# Altium PCB Sampler_DIOT.PCBDOC (part 4 of 10)
Units mm, origin at the board's own origin, x right, y up, seen from the top; angles counter-clockwise.
Board outline 222.9 x 100 mm, 4 copper layers (L1, P2, L3, L4), stack 1.6 mm thick; 697 components, 418 nets, 2175 pads, 1124 vias.
Unrouted connection lines stored in the file: 6.
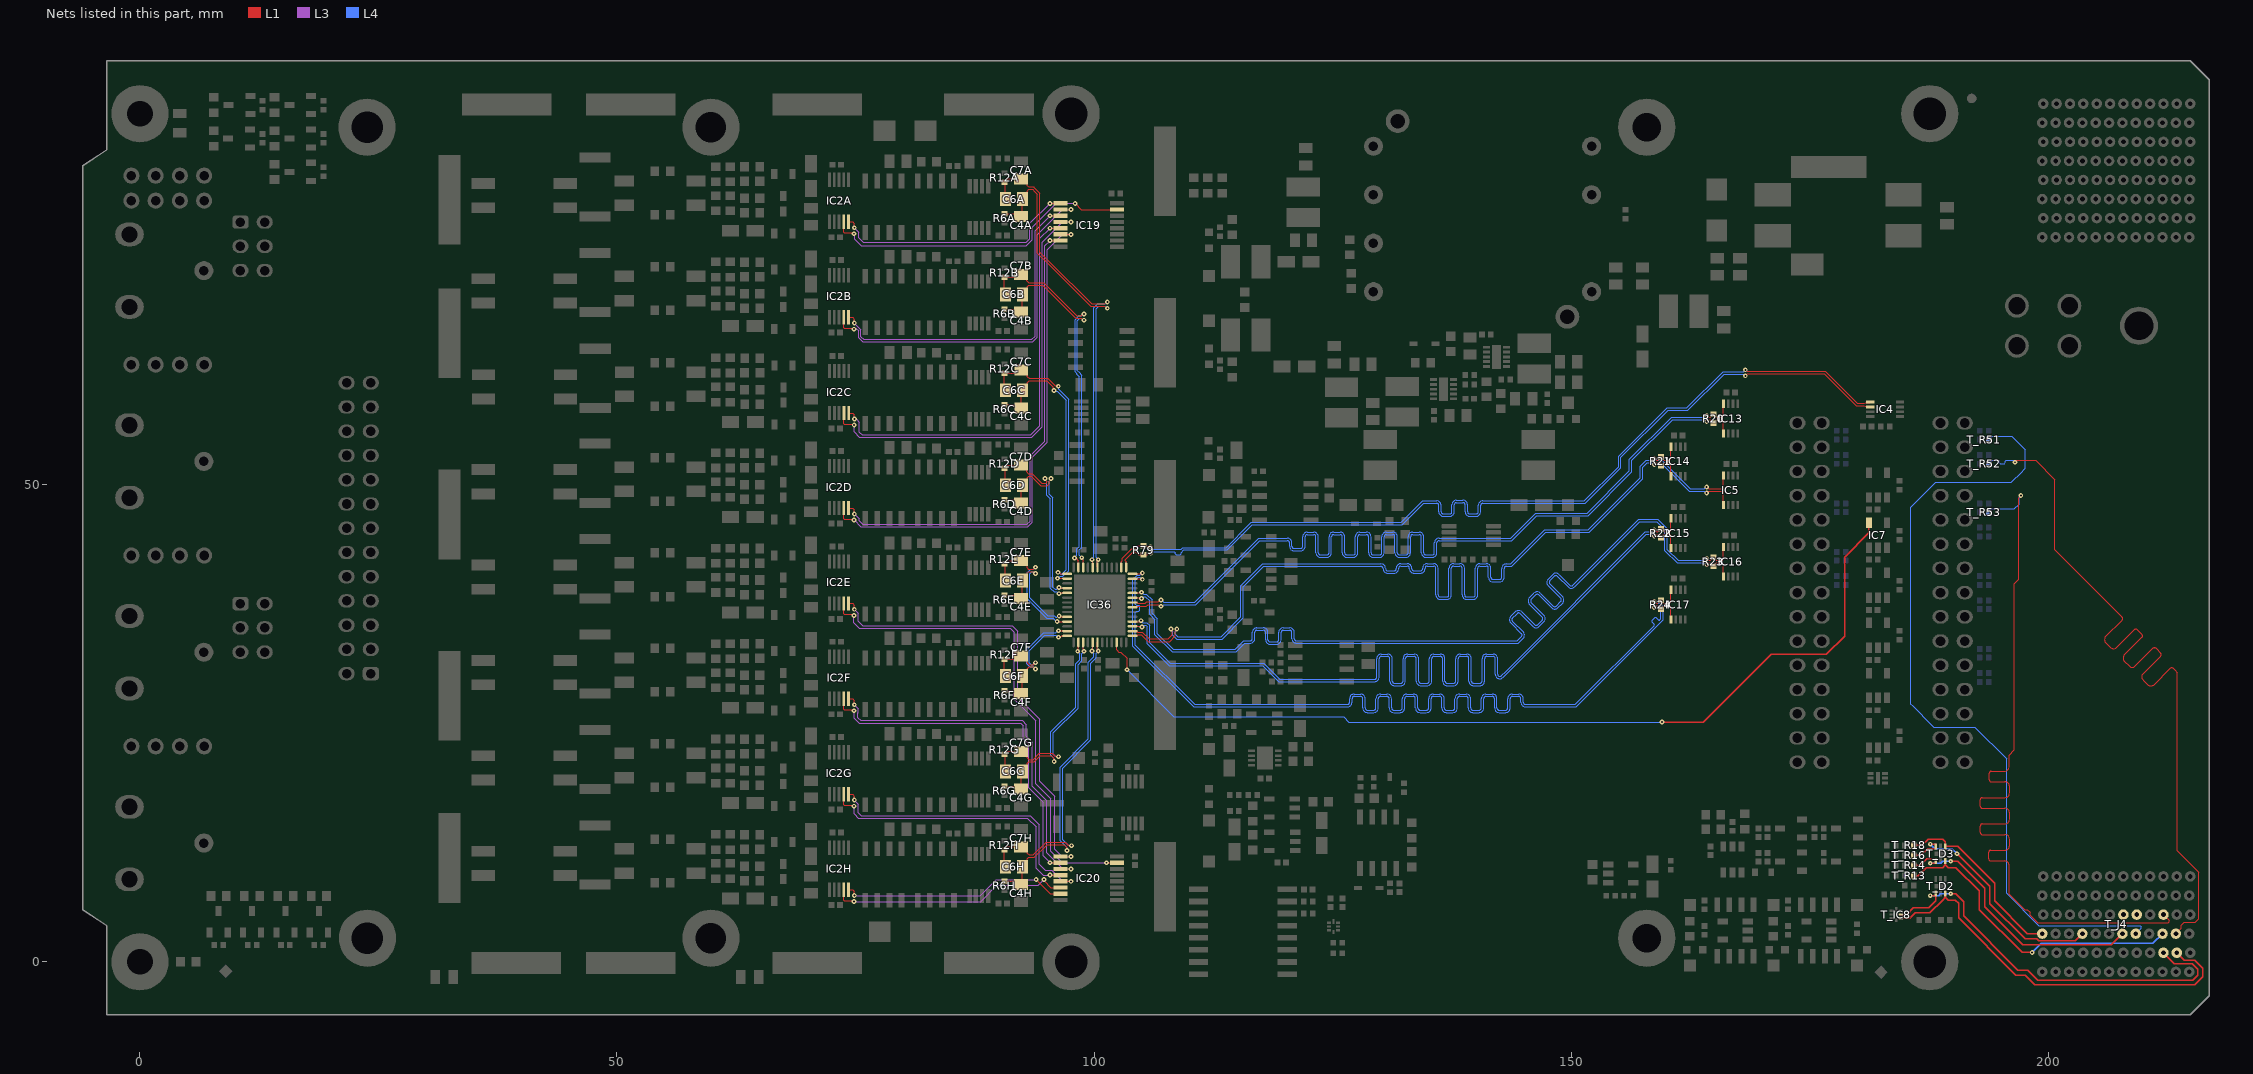
[diagram p5: the nets of this part, all layers, seen from the top]

## Part data (continued)
R58 R70: library part R0603_36k_1%_0.1W_100PPM, "Resistor - 1%", Case=0603, Manufacturer=GENERIC, Manufacturer1 ComponentHeight=0.55mm, Manufacturer1 Example="NIC COMPONENT", Manufacturer1 Part Number=NRC06F3602TRF, Manufacturer Part Number=R0603_36K_1%_0.1W_100PPM, Power=0.1W, Tolerance=±1%, Author="CERN DEM JLC", Component Type=Standard, CreateDate=03.12.2007, HelpURL=\\cern.ch\dfs\Applications\Altium\Datasheets\R0603_NIC_NRC.pdf, LatestRevisionDate=13.03.2008, Mounted=Yes, Part Description="General Purpose Thick Film Chip Resistor", Part Number=R0603_36K_1%_0.1W_100PPM, Pin Count=2, PressFit=No, Sense=No, SMD=Yes, Socket=No, Status=Preferred, TC=±100ppm/°C
R62 R73: library part R0402_62K_1%_0.0625W_100PPM, "Resistor - 1%", Case=0402, Manufacturer=GENERIC, Manufacturer1 ComponentHeight=0.4mm, Manufacturer1 Example="YAGEO PHYCOMP", Manufacturer1 Part Number=232270676203L, Power=0.0625W, Tolerance=±1%, Author="CERN DEM JLC", Component Type=Standard, CreateDate=03.12.2007, HelpURL=\\cern.ch\dfs\Applications\Altium\Datasheets\R0402_Phycomp_RC0402.pdf, LatestRevisionDate=17.10.2012, Manufacturer Part Number=R0402_62K_1%_0.0625W_100PPM, Mounted=Yes, Part Description="General Purpose Thick Film Chip Resistor", Part Number=R0402_62K_1%_0.0625W_100PPM, Pin Count=2, PressFit=No, Sense=No, SMD=Yes, Socket=No, Status="Not Recommended", TC=±100ppm/°C
R66: library part R0603_270K_1%_0.1W_100PPM, "Resistor - 1%", Case=0603, Manufacturer=GENERIC, Manufacturer1 ComponentHeight=0.55mm, Manufacturer1 Example="NIC COMPONENT", Manufacturer1 Part Number=NRC06F2703TRF, Power=0.1W, Tolerance=±1%, Author="CERN DEM JLC", Component Type=Standard, CreateDate=03.12.2007, HelpURL=\\cern.ch\dfs\Applications\Altium\Datasheets\R0603_NIC_NRC.pdf, LatestRevisionDate=13.03.2008, Manufacturer Part Number=R0603_270K_1%_0.1W_100PPM, Mounted=Yes, Part Description="General Purpose Thick Film Chip Resistor", Part Number=R0603_270K_1%_0.1W_100PPM, Pin Count=2, Sense=No, SMD=Yes, Socket=No, Status=Preferred, TC=±100ppm/°C
R68 R77: library part R0603_82K_1%_0.1W_100PPM, "Resistor - 1%", Case=0603, Manufacturer=GENERIC, Manufacturer1 ComponentHeight=0.55mm, Manufacturer1 Example="NIC COMPONENT", Manufacturer1 Part Number=NRC06F8202TRF, Power=0.1W, Tolerance=±1%, Author="CERN DEM JLC", Component Type=Standard, CreateDate=03.12.2007, HelpURL=\\cern.ch\dfs\Applications\Altium\Datasheets\R0603_NIC_NRC.pdf, LatestRevisionDate=13.03.2008, Manufacturer Part Number=R0603_82K_1%_0.1W_100PPM, Mounted=Yes, Part Description="General Purpose Thick Film Chip Resistor", Part Number=R0603_82K_1%_0.1W_100PPM, Pin Count=2, Sense=No, SMD=Yes, Socket=No, Status=Preferred, TC=±100ppm/°C
R71 R72: library part R0402_33K_1%_0.0625W_100PPM, "Resistor - 1%", Case=0402, Manufacturer=GENERIC, Manufacturer1 ComponentHeight=0.4mm, Manufacturer1 Example="YAGEO PHYCOMP", Manufacturer1 Part Number=232270673303L, Power=0.0625W, Tolerance=±1%, Author="CERN DEM JLC", Component Type=Standard, CreateDate=03.12.2007, HelpURL=\\cern.ch\dfs\Applications\Altium\Datasheets\R0402_Phycomp_RC0402.pdf, LatestRevisionDate=17.10.2012, Manufacturer Part Number=R0402_33K_1%_0.0625W_100PPM, Mounted=Yes, Part Description="General Purpose Thick Film Chip Resistor", Part Number=R0402_33K_1%_0.0625W_100PPM, Pin Count=2, PressFit=No, Sense=No, SMD=Yes, Socket=No, Status="Not Recommended", TC=±100ppm/°C
R76: library part R0603_1K_1%_0.1W_100PPM, "Resistor - 1%", Case=0603, Manufacturer=GENERIC, Manufacturer1 ComponentHeight=0.55mm, Manufacturer1 Example="NIC COMPONENT", Manufacturer1 Part Number=NRC06F1001TRF, Power=0.1W, Tolerance=±1%, Author="CERN DEM JLC", Component Type=Standard, CreateDate=03.12.2007, HelpURL=\\cern.ch\dfs\Applications\Altium\Datasheets\R0603_NIC_NRC.pdf, LatestRevisionDate=13.03.2008, Manufacturer Part Number=R0603_1K_1%_0.1W_100PPM, Mounted=Yes, Part Description="General Purpose Thick Film Chip Resistor", Part Number=R0603_1K_1%_0.1W_100PPM, Pin Count=2, Sense=No, SMD=Yes, Socket=No, Status=Preferred, TC=±100ppm/°C
R91: library part R0402_470R_1%_0.0625W_100PPM, "Resistor - 1%", Case=0402, Manufacturer=GENERIC, Manufacturer1 ComponentHeight=0.4mm, Manufacturer1 Example="YAGEO PHYCOMP", Manufacturer1 Part Number=232270674701L, Power=0.0625W, Tolerance=±1%, Author="CERN DEM JLC", Component Type=Standard, CreateDate=03.12.2007, HelpURL=\\cern.ch\dfs\Applications\Altium\Datasheets\R0402_Phycomp_RC0402.pdf, LatestRevisionDate=17.10.2012, Manufacturer Part Number=R0402_470R_1%_0.0625W_100PPM, Mounted=Yes, Part Description="General Purpose Thick Film Chip Resistor", Part Number=R0402_470R_1%_0.0625W_100PPM, Pin Count=2, PressFit=No, Sense=No, SMD=Yes, Socket=No, Status="Not Recommended", TC=±100ppm/°C
RN1A RN1B RN1C RN1D RN1E RN1F RN1G RN1H RN2A RN2B RN2C RN2D RN2E RN2F RN2G RN2H RN3 RN4: library part RN_10K_5K_VISHAY_AORN2-1AT3, "DIL8 Resistor Network 4 Resistors 10k-5k-5k-10k 0.1%", Case=SOIC8, Manufacturer="VISHAY DALE", Manufacturer Part Number=AORN2-1AT3, Power=4x0.1W, Tolerance=0.1%, Author="CERN DEM JLC", ComponentHeight=1.73mm, Component Type=Standard, CreateDate=20.02.2017, HelpURL=\\cern.ch\dfs\Applications\Altium\Datasheets\RN_VISHAY_AORN.pdf, LatestRevisionDate=20.02.2017, Mounted=Yes, Part Description="Dual-In-Line Thin Film Precision Automotive Resistors Network, (4 Isolated) - AORN Series", Part Number=RN_10K_5K_VISHAY_AORN2-1AT3, Pin Count=8, PressFit=No, Sense=No, SMD=Yes, Socket=No, TC=±25ppm/°C
rT_J1 T_J2: library part 3M_N2530-6002RB, "Connector 30 Male", Manufacturer=3M, Manufacturer Part Number=N2530-6002RB, Author="CERN DEM JLC", ComponentHeight=10.03mm, Component Type=Standard, CreateDate=11.02.2009, Family="Header 30", HelpURL=\\cern.ch\dfs\Applications\Altium\Datasheets\3M_N2530-6002RB.pdf, LatestRevisionDate=11.08.2009, Mounted=Yes, Part Description="30 Contacts - Straight .100'' x .100'' Low Profile Four-Wall Header, 2500 Series", Part Number=3M_N2530-6002RB, Pin Count=30, PressFit=No, Sense=No, SMD=No, Socket=No, Status=None
SCREW1 SCREW2: library part BOSSARD_BN5687-3061606_v, "Screw", Manufacturer=BOSSARD, Manufacturer Part Number="BN5687 Art.3061606", Author="CERN DEM JLC", Component Type=Mechanical, ComponentHeight=2.4mm, CreateDate=07.02.2013, HelpURL=\\cern.ch\dfs\Applications\Altium\Datasheets\BOSSARD_BN5687-3061606.pdf, LatestRevisionDate=07.02.2013, Mounted=Yes, PackageDescription="M3 L=8mm Hexalobular Socket Pan Head Screw, Fully Threaded - Stainless Steel A2", Part Description="M3 L=8mm Hexalobular Socket Pan Head Screw, Fully Threaded, Stainless Steel A2", Part Number=BOSSARD_BN5687-3061606_v, Pin Count=0, PressFit=No, Sense=No, SMD=No, Socket=No, Status=None
Standoff1 Standoff2: library part SAMTEC_SO-1115-03-02-02-N, "Standoff Male-Female", Manufacturer=SAMTEC, Manufacturer Part Number=SO-1115-03-02-02-N, Author="CERN DEM BC", Component Type=Mechanical, ComponentHeight=11.15mm, CreateDate=21.07.2020, HelpURL=\\cern.ch\dfs\Applications\Altium\Datasheets\SAMTEC_SO-1115-03-02-02-N.pdf, LatestRevisionDate=21.07.2020, Mounted=Yes, PackageDescription="11.15mm Length, Precision Board Stacking Standoff M3 Male/Female", Part Description="11.15mm Length, Precision Board Stacking Standoff M3 Male/Female", Part Number=SAMTEC_SO-1115-03-02-02-N, Pin Count=1, PressFit=No, Sense=No, SMD=No, Socket=No, Status=None
SW1A SW1B SW1C SW1D SW1E SW1F SW1G SW1H: library part SW_CTS_204-121ST, "2x SPST DIP Switch 1NO + 1NF", Manufacturer=CTS, Manufacturer Part Number=204-121ST, Author="CERN DEM JLC", ComponentHeight=10.36mm, Component Type=Standard, CreateDate=28.08.2014, Family=Switch, HelpURL=\\cern.ch\dfs\Applications\Altium\Datasheets\SW_CTS_204-121ST.pdf, LatestRevisionDate=28.08.2014, Mounted=Yes, PackageDescription="Body 7.26 x 9.78mm, 2x SPST DIP, 1NO + 1NF Switch, CTS 204 Series", Part Description="Coupled SPST DIP Switch, 1NO + 1NF, CTS 204 Series", Part Number=SW_CTS_204-121ST, Pin Count=4, PressFit=No, Sense=No, SMD=Yes, Socket=No, Status=None
T1 T2 T3 T4 T5 T6 T7 T8 T9: "N-CHANNEL MOSFET WITH DIODE", Case=SOT23-3, Manufacturer="ON SEMICONDUCTOR", Author="CERN DEM JLC", Bonding=No, ComponentHeight=1.11mm, Component Type=Standard, CreateDate=23.03.2009, Device=BSS138LT1G, HelpURL=\\cern.ch\dfs\Applications\Altium\Datasheets\BSS138LT1G.pdf, LatestRevisionDate=23.03.2009, Manufacturer Part Number=BSS138LT1G, Mounted=Yes, PackageDescription="SOT23 3-Leads, Pitch 0.95mm - Body 1.4x3mm, IPC Medium Density", Part Description="50V 200mA N-Channel Enhancement Mode Field-Effect Transistor", Part Number=BSS138LT1G, Pin Count=3, PressFit=No, Sense=No, SMD=Yes, Socket=No
T_B7 T_B8: library part PLATED_HOLE2.7_PAD6.0, "Single Terminal Socket", Author="CERN DEM HF", Component Type="Standard (No BOM)", ComponentHeight=0mm, CreateDate=28.08.2024, Family="Plated Hole", HelpURL=Undefined, LatestRevisionDate=28.08.2024, Mounted=No, PackageDescription="Plated Through Hole: Hole Dia.=2.7mm Pad Dia.=6.0mm", Part Description="Plated Through Hole: Hole Dia.=2.7mm Pad Dia.=6.0mm", Part Number=PLATED_HOLE2.7_PAD6.0, Pin Count=1, Sense=No, SMD=No, Socket=No, Status=None
T_C2: library part CTE3216-18_4.7UF_10V_10%_AVX_TPSA475K010T1400, "Polarised capacitor", Case=A, Manufacturer=AVX, Manufacturer Part Number=TPSA475K010T1400, Tolerance=±10%, Voltage=10V, Author="CERN DEM JLC", Component Type=Standard, ComponentHeight=1.8mm, CreateDate=23.01.2018, HelpURL=\\cern.ch\dfs\Applications\Altium\Datasheets\CTE-LESR_AVX_TPS-AUTO.pdf, LatestRevisionDate=23.01.2018, Mounted=Yes, Part Description="Low ESR 1R4 Automotive Solid Tantalum Chip Capacitor", Part Number=CTE3216-18_4.7UF_10V_10%_AVX_TPSA475K010T1400, Pin Count=2, Sense=No, SMD=Yes, Socket=No, Status=Preferred
T_D1 T_D2 T_D3: library part CMP-004-00037-2, "Diode TVS Quint Common Anode Uni-Dir 3.3V 40W 6-Pin SLP EP T/R", Max Operating Temperature=125°C, Min Operating Temperature=-55°C, Mounting Technology="Surface Mount", Pins=6
T_D6: "Schottky Diode", Case=SOD-523F, Manufacturer=COMCHIP, Power=500mA, Voltage=20V, Author="CERN DEM HF", Bonding=No, Component Type=Standard, ComponentHeight=1mm, CreateDate=13.10.2023, Device=CDBU0520-HF, HelpURL=\\cern.ch\dfs\Applications\Altium\Datasheets\CDBU0520-HF.pdf, LatestRevisionDate=13.10.2023, Manufacturer Part Number=CDBU0520-HF, Mounted=Yes, PackageDescription="Small Outline Diode Flat Lead (SOD-523F), Body; 1.80mm L X 1mm W X 0.85mm H", Part Description="20V Surface mount Schottky Barrier Diode", Part Number=CDBU0520-HF, Pin Count=2, PressFit=No, Sense=No, SMD=Yes, Socket=No
T_FL1: library part FIL_MURATA_BNX022-01L, "Block Type EMIFIL (LC Combined)", Manufacturer=MURATA, Manufacturer Part Number=BNX022-01L, Resistance=0.5R, Author="CERN DEM JLC", Component Type=Standard, ComponentHeight=3.3mm, CreateDate=10.10.2012, HelpURL=\\cern.ch\dfs\Applications\Altium\Datasheets\FIL_MURATA_BNX022-01L.pdf, LatestRevisionDate=10.10.2012, Mounted=Yes, Part Description="Block Type EMIFIL (LC Combined) SMD Type, BNX02* Series", Part Number=FIL_MURATA_BNX022-01L, Pin Count=2, Sense=No, SMD=Yes, Socket=No, Status=None
T_IC1: "500mA Peak Output LDO Regulator", Case=SOT23-5, Manufacturer="MICROCHIP TECHNOLOGY", Author="CERN DEM WB", Bonding=No, Component Type=Standard, ComponentHeight=1.45mm, CreateDate=2019-04-16, Device=MIC5219-3.3YM5, HelpURL=\\cern.ch\dfs\Applications\Altium\Datasheets\MIC5219-3.3YM5.pdf, LatestRevisionDate=2019-04-16, Manufacturer Part Number=MIC5219-3.3YM5, Mounted=Yes, PackageDescription="SOT, 0.95mm pitch; 5 pin, 1.60mm W X 2.90mm L X 1.45mm H body, IPC Medium Density", Part Description="3.3V 500mA Peak Output Low Drop-Out  (LDO) Regulator", Part Number=MIC5219-3.3YM5, Pin Count=5, PressFit=No, Sense=No, SMD=Yes, Socket=No
T_IC2 T_IC4: "1.7V-5.5V, 2K I2C Serial EEPROM With EUI-48 Node Identity", Case=SOT23-5, Manufacturer="MICROCHIP TECHNOLOGY", Author="CERN DEM MR", Bonding=No, Component Type=Standard, ComponentHeight=1.45mm, CreateDate=31.03.2016, Device=24AA02E48T-I/OT, HelpURL=\\cern.ch\dfs\Applications\Altium\Datasheets\24AA02E48T-I-OT.pdf, LatestRevisionDate=31.03.2016, Manufacturer Part Number=24AA02E48T-I/OT, Mounted=Yes, PackageDescription="SOT, 0.95mm pitch; 5 pin, 1.60mm W X 2.90mm L X 1.45mm H body, IPC Medium Density", Part Description="1.7V-5.5V, 2K I2C Serial EEPROM with EUI-48 Node Identity", Part Number=24AA02E48T-I/OT, Pin Count=5, PressFit=No, Sense=No, SMD=Yes, Socket=No
T_IC3 T_IC5: "1.7V-5.5V, 2K I2C™ Serial EEPROMs with EUI-48™ Node Identity", Case=SOIC8, Manufacturer="MICROCHIP TECHNOLOGY", Author="CERN DEM MR", Bonding=No, Component Type=Standard, ComponentHeight=1.75mm, CreateDate=19.07.2016, Device=24AA025E48-I/SN, HelpURL=\\cern.ch\dfs\Applications\Altium\Datasheets\24AA025E48-I-SN.pdf, LatestRevisionDate=19.07.2016, Manufacturer Part Number=24AA025E48-I/SN, Mounted=Yes, PackageDescription="SOIC 8, Pitch 1.27mm - Body 4x5mm, IPC Medium Density", Part Description="1.7V-5.5V, 2K I2C™ Serial EEPROMs with EUI-48™ Node Identity", Part Number=24AA025E48-I/SN, Pin Count=8, PressFit=No, Sense=No, SMD=Yes, Socket=No
T_IC6: library part CMP-010-00652-2, "Serial Switch/Digital Sensor, 9 Bit(s), 3Cel, Square, 8 Pin, Surface Mount", Max Operating Temperature=125°C, Max Supply Voltage=5.5V, Min Operating Temperature=-55°C, Min Supply Voltage=2.7V, Mounting Technology="Surface Mount", Pins=8, RoHS Compliant=Yes, Sensor Type="TEMPERATURE SENSOR,SWITCH/DIGITAL OUTPUT,SERIAL"
T_IC7: "Low Quiescent Current, Programmable-Delay Supervisory Circuit", Case=SOT23-6, Manufacturer="TEXAS INSTRUMENTS", Manufacturer Part Number=TPS3808G01DBV, Author="CERN DEM JLC", Bonding=No, Component Type=Standard, ComponentHeight=1.45mm, CreateDate=22.10.2008, Device=TPS3808G01DBVT, HelpURL=\\cern.ch\dfs\Applications\Altium\Datasheets\TPS3808G01DBVT.pdf, LatestRevisionDate=10.06.2022, Mounted=Yes, PackageDescription="SOT, 0.95mm Pitch; 6 Pin, 1.60mm W X 2.90mm L X 1.45mm H body, IPC Medium Density", Part Description="Adjustable Low Quiescent Current, Programmable-Delay Supervisory Circuit", Part Number=TPS3808G01DBVT, Pin Count=6, PressFit=No, Sense=No, SMD=Yes, Socket=No
T_IC8 T_IC9: library part CMP-015-00014-1, "Dual Supply 2-Bit Voltage Translator/Buffer/Repeater Isolator for I2C Applications", Manufacturer=Onsemi, Max Operating Temperature=85°C, Max Supply Voltage=5.5V, Min Operating Temperature=-40°C, Min Supply Voltage=1.65V, Manufacaturer Part Number=FXMA2102UMX, Mounting Technology="Surface Mount", Pins=8
T_J4: library part AMPHENOL_10052825-101LF, "72 Contacts Header, 6 Columns, 4 Pairs per Column", Manufacturer=AMPHENOL, Manufacturer Part Number=10052825-101LF, Author="CERN DEM MR", ClassName=Overlapping, Component Type=Standard, ComponentHeight=15.35mm, ComponentLink1Description=Application, ComponentLink1URL=\\cern.ch\dfs\Applications\Altium\Datasheets\AMPHENOL_10052825-101LF_Application.pdf, CreateDate=19/02/2018, Family="AirMax VS", HelpURL=\\cern.ch\dfs\Applications\Altium\Datasheets\AMPHENOL_10052825-101LF.pdf, LatestRevisionDate=19/02/2018, Mounted=Yes, Part Description="72 Contacts, 2mm Pitch, 6 Columns, 4 Pairs per Column, 4 Walls, Right Angle Header", Part Number=AMPHENOL_10052825-101LF, Pin Count=72, PressFit=Yes, Sense=No, SMD=No, Socket=No, Status=None
T_J5: library part AMPHENOL_10052838-101LF, "96 Contacts Header, 8 Columns, 4 Pairs per Column", Manufacturer=AMPHENOL, Manufacturer Part Number=10052838-101LF, Author="CERN DEM MR", Component Type=Standard, ComponentHeight=15.35mm, ComponentLink1Description=Application, ComponentLink1URL=\\cern.ch\dfs\Applications\Altium\Datasheets\AMPHENOL_10052838-101LF_Application.pdf, CreateDate=19.02.2018, Family="AirMax VS", HelpURL=\\cern.ch\dfs\Applications\Altium\Datasheets\AMPHENOL_10052838-101LF.pdf, LatestRevisionDate=19.02.2018, Mounted=Yes, Part Description="96 Contacts, 2mm Pitch, 8 Columns, 4 Pairs per Column, 4 Walls, Right Angle Header", Part Number=AMPHENOL_10052838-101LF, Pin Count=96, PressFit=Yes, Sense=No, SMD=No, Socket=No, Status=None
T_J6: library part MOLEX_39-30-0040, "Connector 4 Male", Manufacturer=MOLEX, Manufacturer Part Number=39-30-0040, Author="CERN DEM JLC", Component Type=Standard, ComponentHeight=11.4mm, CreateDate=2018-10-02, Family="Mini-Fit Jr.™", HelpURL=\\cern.ch\dfs\Applications\Altium\Datasheets\MOLEX_39-30-0040.pdf, LatestRevisionDate=2018-10-02, Mounted=Yes, Part Description="4.20mm (.165\") Pitch Mini-Fit Jr. Header, Dual Row, Right Angle with Snap-in Plastic Peg PCB Lock, 4 Circuits", Part Number=MOLEX_39-30-0040, Pin Count=4, PressFit=No, Sense=No, SMD=No, Socket=No, Status=None
T_M1 T_M2 T_M3 T_M4: library part CMP-00028-00019-2, "PTH  Hole 3.4, 6mm pad", Pins=1
T_R13 T_R14 T_R15 T_R16 T_R17 T_R18: library part R0402_22R_1%_0.0625W_100PPM, "Resistor - 1%", Case=0402, Manufacturer=GENERIC, Manufacturer1 ComponentHeight=0.4mm, Manufacturer1 Example="YAGEO PHYCOMP", Manufacturer1 Part Number=232270672209L, Power=0.0625W, Tolerance=±1%, Author="CERN DEM JLC", Component Type=Standard, CreateDate=03.12.2007, HelpURL=\\cern.ch\dfs\Applications\Altium\Datasheets\R0402_Phycomp_RC0402.pdf, LatestRevisionDate=17.10.2012, Manufacturer Part Number=R0402_22R_1%_0.0625W_100PPM, Mounted=Yes, Part Description="General Purpose Thick Film Chip Resistor", Part Number=R0402_22R_1%_0.0625W_100PPM, Pin Count=2, PressFit=No, Sense=No, SMD=Yes, Socket=No, Status="Not Recommended"
T_R19: library part R0402_200R_1%_0.0625W_100PPM, "Resistor - 1%", Case=0402, Manufacturer=GENERIC, Manufacturer1 ComponentHeight=0.4mm, Manufacturer1 Example="YAGEO PHYCOMP", Manufacturer1 Part Number=232270672001L, Power=0.0625W, Tolerance=±1%, Author="CERN DEM JLC", Component Type=Standard, CreateDate=2007-12-03, HelpURL=\\cern.ch\dfs\Applications\Altium\Datasheets\R0402_Phycomp_RC0402.pdf, LatestRevisionDate=2012-10-17, Manufacturer Part Number=R0402_200R_1%_0.0625W_100PPM, Mounted=Yes, Part Description="General Purpose Thick Film Chip Resistor", Part Number=R0402_200R_1%_0.0625W_100PPM, Pin Count=2, PressFit=No, Sense=No, SMD=Yes, Socket=No, Status="Not Recommended", TC=±100ppm/°C
T_R26: library part R0805_1M1_1%_0.125W_100PPM, "Resistor - 1%", Case=0805, Manufacturer=GENERIC, Manufacturer1 ComponentHeight=0.6mm, Manufacturer1 Example="NIC COMPONENT", Manufacturer1 Part Number=NRC10F1104TRF, Author="CERN DEM JLC", Component Type=Standard, CreateDate=03/12/2007, HelpURL=\\cern.ch\dfs\Applications\Altium\Datasheets\R0805_NIC_NRC.pdf, LatestRevisionDate=13/03/2008, Manufacturer Part Number=R0805_1M1_1%_0.125W_100PPM, Mounted=Yes, Part Description="General Purpose Thick Film Chip Resistor", Part Number=R0805_1M1_1%_0.125W_100PPM, Pin Count=2, PressFit=No, Sense=No, SMD=Yes, Socket=No, Status=Preferred
T_R27 T_R28: library part "R0805_10M_1%_0.125W_100PPM_VISHAY_CRCW e3", "Resistor - 1%", Case=0805, Manufacturer="VISHAY DALE", Manufacturer Part Number=CRCW080510M0FKEA, Power=0.125W, Tolerance=±1%, Author="CERN DEM BC", Component Type=Standard, ComponentHeight=0.5mm, CreateDate=2019-11-12, HelpURL="\\cern.ch\dfs\Applications\Altium\Datasheets\R0805_VISHAY_CRCW e3.pdf", LatestRevisionDate=2019-11-12, Mounted=Yes, Part Description="150V, Standard Thick Film Chip Resistor", Part Number="R0805_10M_1%_0.125W_100PPM_VISHAY_CRCW e3", Pin Count=2, PressFit=No, Sense=No, SMD=Yes, Socket=No, Status=None, TC=±100ppm/°C
T_T1 T_T2 T_T3 T_T4 T_T5: "N-CHANNEL MOSFET WITH DIODE", Case=SOT23-3, Manufacturer="ON SEMICONDUCTOR", Manufacturer Part Number=BSS138L, Author="CERN DEM JLC", Bonding=No, Component Type=Standard, ComponentHeight=1.11mm, CreateDate=23.03.2009, Device=BSS138LT1G, HelpURL=\\cern.ch\dfs\Applications\Altium\Datasheets\BSS138LT1G.pdf, LatestRevisionDate=25.05.2022, Mounted=Yes, PackageDescription="SOT23, 0.95mm Pitch; 3 Pin, 1.40mm W X 3.00mm L X 1.10mm H body, IPC Medium Density", Part Description="50V, 200mA N-Channel Enhancement Mode Field-Effect Transistor", Part Number=BSS138LT1G, Pin Count=3, PressFit=No, Sense=No, SMD=Yes, Socket=No
TP1 TP2 TP3 TP4 TP5 TP6 TP7 TP8 TP9 TP10 TP11 TP12 TP13 TP14 TP15 TP16 TP17 TP18 TP19 TP20: library part SMD_PAD_1.27X1.27MM, Author="CERN DEM JLC", ComponentHeight=0mm, Component Type="Standard (No BOM)", CreateDate=12.01.2008, Family="Test Point", HelpURL=Undefined, LatestRevisionDate=12.01.2008, Mounted=No, PackageDescription="1.27mm x 1.27mm PCB Copper Area (SMD Test Point)", Part Description="1.27mm x 1.27mm PCB Copper Area (SMD Test Point)", Part Number=SMD_PAD_1.27X1.27MM, Pin Count=1, Sense=No, SMD=Yes, Socket=No, Status=None
WASHER1 WASHER2 WASHER3 WASHER4: library part BOSSARD_BN678-1250191_v, "Washer", Manufacturer=BOSSARD, Manufacturer Part Number="BN678 Art.1250191", Author="CERN DEM JLC", Component Type=Mechanical, ComponentHeight=0.5mm, CreateDate=15.01.2013, HelpURL=\\cern.ch\dfs\Applications\Altium\Datasheets\BOSSARD_BN678-1250191.pdf, LatestRevisionDate=11.12.2013, Mounted=Yes, PackageDescription="Waved Spring Washer for M3 Screw, Stainless Steel A2 / 1.4310", Part Description="Waved Spring Washer for M3 Screw, Stainless Steel A2 / 1.4310", Part Number=BOSSARD_BN678-1250191_v, Pin Count=0, PressFit=No, Sense=No, SMD=No, Socket=No, Status=Obsolete, Status Comment="Replaced by BOSSARD_BN83728-8243964_v"

## Free pads (board coordinates)
  round 6 / inner round 4.5 / far side round 6 hole 3.2: MH(59.844,2.48) MH(59.844,87.48)

## Via types
v1: diameter 0.5, hole 0.2, L1 to L4, tented both sides, 1103 vias
v2: diameter 1, hole 0.6, L1 to L4, tented both sides, 15 vias
v3: diameter 0.6, hole 0.3, L1 to L4, tented both sides, 6 vias

## Nets (pads, with @x,y where several pads share a name; then routed paths per layer and width w, separated by ;. In a path a pad name is that pad's centre, name@x,y a point inside that pad or via, vN(x,y) a via of type N, cw(c..) or ccw(c..) an arc to the next point about the centre after c; other vN are vias at no path point)
A00: IC2A.4 IC19.15 | length 33.7
  L1 w0.127: IC2A.4@73.775,77.567 73.775,76.458 73.825,76.408 74.754,76.408 v1(74.85,76.312) ; v1(98.025,79.5) 98.675,78.85 IC19.15@102.399,78.85
  L3 w0.127: v1(74.85,76.312) 74.934,76.397 74.934,75.73 75.618,75.045 92.893,75.045 93.544,75.697 93.544,76.993 96.05,79.5 v1(98.025,79.5)
A01: IC2B.4 IC19.2 | length 39.2
  L1 w0.127: IC2B.4@73.775,67.567 73.775,66.458 73.825,66.408 74.754,66.408 v1(74.85,66.312) ; IC19.2@96.499,78.85 v1(97.601,78.85)
  L3 w0.127: v1(74.85,66.312) 74.934,66.397 75.043,66.397 75.315,66.125 75.315,65.425 75.739,65.001 93.599,65.001 94.073,65.475 94.073,76.232 96.691,78.85 v1(97.601,78.85)
A02: IC2C.4 IC19.4 | length 47.8
  L1 w0.127: IC2C.4@73.788,57.523 73.788,56.414 73.838,56.364 74.767,56.364 v1(74.863,56.269) ; IC19.4@96.499,77.55 v1(97.601,77.55)
  L3 w0.127: v1@74.947,56.353 v1(74.863,56.269) 74.863,55.536 75.398,55.001 93.486,55.001 94.581,56.096 94.581,75.431 96.7,77.55 v1(97.601,77.55)
A03: IC2D.4 IC19.6 | length 54.9
  L1 w0.127: IC2D.4@73.775,47.567 73.775,46.458 73.825,46.408 74.754,46.408 v1(74.85,46.312) ; IC19.6@96.499,76.25 v1(97.601,76.25)
  L3 w0.127: v1(74.85,46.312) 75.576,45.586 93.051,45.586 93.548,46.084 93.548,52.897 95.089,54.438 95.089,74.634 96.705,76.25 v1(97.601,76.25)
A04: IC2E.4 IC20.15 | length 52.4
  L1 w0.127: IC2E.4@73.775,37.567 73.775,36.458 73.825,36.408 74.754,36.408 v1(74.85,36.312) ; v1(101.297,10.387) IC20.15@102.399,10.387
  L3 w0.127: v1@74.934,36.397 v1(74.85,36.312) 74.794,36.256 74.794,35.559 75.373,34.98 91.223,34.98 91.643,34.56 91.643,27.529 93.912,25.26 93.912,18.663 95.475,17.1 95.475,11.6 96.688,10.387 v1(101.297,10.387)
A05: IC2F.4 IC20.2 | length 37.8
  L1 w0.127: IC2F.4@73.775,27.567 73.775,26.458 73.825,26.408 74.754,26.408 v1(74.85,26.312) ; v1(95.397,10.387) IC20.2@96.499,10.387
  L3 w0.127: v1@74.934,26.397 v1(74.85,26.312) 74.85,25.524 75.369,25.005 92.345,25.005 92.596,24.754 92.596,23.441 93.166,22.871 93.166,18.247 94.687,16.725 94.687,11.096 v1(95.397,10.387)
A06: IC2G.4 IC20.4 | length 30
  L1 w0.127: IC2G.4@73.775,17.567 73.775,16.458 73.825,16.408 74.754,16.408 v1(74.85,16.312) ; v1(95.397,9.087) IC20.4@96.499,9.087
  L3 w0.127: v1@74.934,16.397 v1(74.85,16.312) 74.85,15.499 75.278,15.071 92.998,15.071 93.925,14.144 93.925,9.825 94.663,9.087 v1(95.397,9.087)
A07: IC2H.4 IC20.6 | length 25.3
  L1 w0.127: IC2H.4@73.775,7.567 73.775,6.458 73.825,6.408 74.754,6.408 v1(74.85,6.312) ; v1(94.75,8.625) 94.75,8.528 95.491,7.787 IC20.6@96.499,7.787
  L3 w0.127: v1(74.85,6.312) 88.112,6.312 89.825,8.025 94.151,8.025 v1(94.75,8.625)
A10: IC2A.5 IC19.1 | length 26.3
  L1 w0.127: IC2A.5@74.275,77.567 74.688,77.567 74.875,77.379 v1(74.875,76.947) ; v1(95.397,79.5) IC19.1@96.499,79.5
  L3 w0.127: v1(74.875,76.947) 75.334,76.489 75.334,75.91 75.837,75.407 92.895,75.407 93.29,75.802 93.29,77.393 v1(95.397,79.5)
A11: IC2B.5 IC19.3 | length 35.7
  L1 w0.127: IC2B.5@74.275,67.567 74.688,67.567 74.875,67.379 v1(74.875,66.947) ; v1(95.397,78.2) IC19.3@96.499,78.2
  L3 w0.127: v1(74.875,66.947) 75.569,66.254 75.569,65.53 75.844,65.255 93.494,65.255 93.819,65.58 93.819,76.622 v1(95.397,78.2)
A12: IC2C.5 IC19.5 | length 44.5
  L1 w0.127: IC2C.5@74.288,57.523 74.7,57.523 74.888,57.335 v1(74.888,56.904) ; v1(95.397,76.9) IC19.5@96.499,76.9
  L3 w0.127: v1(74.888,56.904) 75.095,56.904 75.419,56.58 75.419,55.53 75.694,55.255 93.369,55.255 94.327,56.213 94.327,75.83 v1(95.397,76.9)
A13: IC2D.5 IC19.7 | length 51.6
  L1 w0.127: IC2D.5@74.275,47.567 74.688,47.567 74.875,47.379 v1(74.875,46.947) ; v1(95.397,75.6) IC19.7@96.499,75.6
  L3 w0.127: v1(74.875,46.947) 75.369,46.454 75.369,46.231 75.76,45.84 92.946,45.84 93.294,46.189 93.294,53.048 94.835,54.589 94.835,75.038 v1(95.397,75.6)
A14: IC2E.5 IC20.1 | length 47.2
  L1 w0.127: IC2E.5@74.275,37.567 74.688,37.567 74.875,37.379 v1(74.875,36.947) ; IC20.1@96.499,11.037 v1(97.601,11.037)
  L3 w0.127: v1(74.875,36.947) 75.291,36.532 75.291,35.709 75.766,35.234 91.437,35.234 92.024,34.647 92.024,27.748 94.337,25.435 94.337,18.913 95.9,17.35 95.9,11.825 96.688,11.037 v1(97.601,11.037)
A15: IC2F.5 IC20.3 | length 39.3
  L1 w0.127: IC2F.5@74.275,27.567 74.688,27.567 74.875,27.379 v1(74.875,26.947) ; IC20.3@96.499,9.737 v1(97.601,9.737)
  L3 w0.127: v1(74.875,26.947) 75.291,26.532 75.291,26.13 75.244,26.083 75.244,25.605 75.544,25.305 92.469,25.305 92.9,24.874 92.9,24.122 92.9,24.025 92.9,23.623 93.51,23.013 93.51,18.403 95.033,16.88 95.033,11.425 96.722,9.737 v1(97.601,9.737)
A16: IC2G.5 IC20.5 | length 31.4
  L1 w0.127: IC2G.5@74.275,17.567 74.688,17.567 74.875,17.379 v1(74.875,16.947) ; IC20.5@96.499,8.437 v1(97.601,8.437)
  L3 w0.127: v1(74.875,16.947) 75.291,16.532 75.291,15.634 75.599,15.325 93.3,15.325 94.275,14.35 94.275,10.213 94.913,9.575 95.575,9.575 96.713,8.437 v1(97.601,8.437)
A17: IC2H.5 IC20.7 | length 24.1
  L1 w0.127: IC2H.5@74.275,7.567 74.688,7.567 74.875,7.379 v1(74.875,6.947) ; v1(93.937,8.62) 93.941,8.62 95.425,7.137 IC20.7@96.499,7.137
  L3 w0.127: v1(74.875,6.947) 88.072,6.947 89.745,8.62 v1(93.937,8.62) v1@94.008,8.549
ADC_CLKOUT_N: IC13.8 IC36.34 R20.2 | length 95.1
  L1 w0.127: IC36.34@104.039,37.665 104.465,37.665 104.563,37.568 105.366,37.568 105.546,37.748 106.756,37.748 106.93,37.921 v1(107.019,37.921) ; v1(164.222,57.262) 164.413,57.071 164.585,57.071 R20.2@164.928,57.414 ; R20.2@164.948,57.414 165.174,57.188 165.174,57.145 165.248,57.071 165.844,57.071 165.978,57.205 IC13.8@165.978,58.494
  L4 w0.127: v1(107.019,37.921) 107.108,37.921 107.33,37.7 110.566,37.7 117.27,44.404 119.465,44.404 120.271,44.404 cw(c120.271,43.925) 120.75,43.925 120.75,43.555 ccw(c120.975,43.555) 120.975,43.33 121.652,43.33 ccw(c121.652,43.555) 121.877,43.555 121.877,44.561 cw(c122.356,44.561) 122.356,45.04 123.033,45.04 cw(c123.033,44.561) 123.512,44.561 123.512,42.878 ccw(c123.737,42.878) 123.737,42.653 124.414,42.653 ccw(c124.414,42.878) 124.639,42.878 124.639,44.561 cw(c125.118,44.561) 125.118,45.04 125.795,45.04 cw(c125.795,44.561) 126.274,44.561 126.274,42.878 ccw(c126.499,42.878) 126.499,42.653 127.176,42.653 ccw(c127.176,42.878) 127.401,42.878 127.401,44.561 cw(c127.88,44.561) 127.88,45.04 128.557,45.04 cw(c128.557,44.561) 129.036,44.561 129.036,42.878 ccw(c129.261,42.878) 129.261,42.653 129.938,42.653 ccw(c129.938,42.878) 130.163,42.878 130.163,44.561 cw(c130.642,44.561) 130.642,45.04 131.319,45.04 cw(c131.319,44.561) 131.798,44.561 131.798,42.878 ccw(c132.023,42.878) 132.023,42.653 132.7,42.653 ccw(c132.7,42.878) 132.925,42.878 132.925,44.561 cw(c133.404,44.561) 133.404,45.04 134.081,45.04 cw(c134.081,44.561) 134.56,44.561 134.56,42.878 ccw(c134.785,42.878) 134.785,42.653 135.462,42.653 ccw(c135.462,42.878) 135.687,42.878 135.687,43.925 cw(c136.166,43.925) 136.166,44.404 136.357,44.404 143.695,44.404 146.31,47.019 151.685,47.019 156.125,51.459 156.125,52.664 160.533,57.073 163.957,57.073 164.146,57.262 v1(164.222,57.262)
ADC_CLKOUT_P: IC13.1 IC36.33 R20.1 | length 95.1
  L1 w0.127: IC36.33@104.039,37.165 104.465,37.165 104.563,37.263 105.492,37.263 105.672,37.443 106.756,37.443 106.93,37.269 v1(107.019,37.269) ; v1(164.222,56.635) 164.404,56.817 164.585,56.817 R20.1@164.928,56.474 ; R20.1@164.948,56.474 165.174,56.701 165.174,56.743 165.248,56.817 165.84,56.817 165.978,56.679 IC13.1@165.978,55.394
  L4 w0.127: v1(107.019,37.269) 107.108,37.269 107.285,37.446 110.671,37.446 117.375,44.15 119.465,44.15 120.271,44.15 cw(c120.271,43.925) 120.496,43.925 120.496,43.555 ccw(c120.975,43.555) 120.975,43.076 121.652,43.076 ccw(c121.652,43.555) 122.131,43.555 122.131,44.561 cw(c122.356,44.561) 122.356,44.786 123.033,44.786 cw(c123.033,44.561) 123.258,44.561 123.258,42.878 ccw(c123.737,42.878) 123.737,42.399 124.414,42.399 ccw(c124.414,42.878) 124.893,42.878 124.893,44.561 cw(c125.118,44.561) 125.118,44.786 125.795,44.786 cw(c125.795,44.561) 126.02,44.561 126.02,42.878 ccw(c126.499,42.878) 126.499,42.399 127.176,42.399 ccw(c127.176,42.878) 127.655,42.878 127.655,44.561 cw(c127.88,44.561) 127.88,44.786 128.557,44.786 cw(c128.557,44.561) 128.782,44.561 128.782,42.878 ccw(c129.261,42.878) 129.261,42.399 129.938,42.399 ccw(c129.938,42.878) 130.417,42.878 130.417,44.561 cw(c130.642,44.561) 130.642,44.786 131.319,44.786 cw(c131.319,44.561) 131.544,44.561 131.544,42.878 ccw(c132.023,42.878) 132.023,42.399 132.7,42.399 ccw(c132.7,42.878) 133.179,42.878 133.179,44.561 cw(c133.404,44.561) 133.404,44.786 134.081,44.786 cw(c134.081,44.561) 134.306,44.561 134.306,42.878 ccw(c134.785,42.878) 134.785,42.399 135.462,42.399 ccw(c135.462,42.878) 135.941,42.878 135.941,43.925 cw(c136.166,43.925) 136.166,44.15 136.357,44.15 143.8,44.15 146.415,46.765 151.79,46.765 156.379,51.354 156.379,52.559 160.639,56.819 163.961,56.819 164.146,56.635 v1(164.222,56.635)
ADC_CNV: IC7.5 IC36.24 | length 97.6
  L1 w0.127: IC36.24@102.364,33.49 102.364,32.702 102.597,32.469 102.813,32.469 103.46,31.822 v1(103.46,30.612)
  L1 w0.152: v1(159.525,25.125) 163.871,25.125 170.995,32.249 176.776,32.249 178.673,34.147 178.673,42.408 181.227,44.962 IC7.5@181.227,46.02
  L4 w0.127: v1(103.46,30.612) 108.382,25.69 126.16,25.69 126.725,25.125 v1(159.525,25.125)
ADC_IN_N0: C4A.2 C6A.2 IC36.47 R6A.2 | length 50.6
  L1 w0.127: R6A.2@90.603,78.426 92.033,78.426 C4A.2@92.353,78.106 92.503,78.256 C6A.2@92.503,79.956 92.981,80.434 92.981,80.794 93.155,80.967 93.558,80.967 93.75,80.775 94.075,80.45 94.075,74.291 95.195,73.17 99.66,68.705 101.133,68.705 101.332,68.506 v1(101.394,68.506) ; IC36.47@100.364,41.34 100.364,42.079 v1(100.44,42.155)
  L4 w0.127: v1(100.44,42.155) 100.44,42.217 100.241,42.416 100.241,68.451 100.496,68.705 101.195,68.705 v1(101.394,68.506)
ADC_IN_N1: C4B.2 C6B.2 IC36.50 R6B.2 | length 39.5
  L1 w0.127: R6B.2@90.603,68.426 92.033,68.426 C4B.2@92.353,68.106 92.503,68.256 C6B.2@92.503,69.956 93.007,70.46 93.007,70.768 93.182,70.943 94.607,70.943 96.025,69.525 98.095,67.455 98.683,67.455 98.882,67.256 v1(98.944,67.256) ; v1(98.719,42.365) 98.719,42.224 98.864,42.079 IC36.50@98.864,41.34
  L4 w0.127: v1(98.719,42.365) 98.719,42.378 98.471,42.626 98.471,43.178 98.704,43.411 98.704,61.496 98.375,61.825 98.267,61.933 98.267,67.216 98.506,67.455 98.683,67.455 98.882,67.256 v1(98.944,67.256)
ADC_IN_N2: C4C.2 C6C.2 IC36.1 R6C.2 | length 29.9
  L1 w0.127: R6C.2@90.616,58.382 92.046,58.382 C4C.2@92.366,58.062 92.366,59.762 C6C.2@92.516,59.912 93.027,60.424 93.027,60.717 93.202,60.892 95.069,60.892 95.743,60.218 95.743,59.955 v1(95.814,59.883) ; v1(96.217,40.829) 96.318,40.829 96.458,40.689 97.165,40.689 IC36.1@97.189,40.665
  L4 w0.127: v1(95.814,59.883) 95.867,59.831 96.13,59.831 96.329,59.632 96.418,59.543 96.78,59.18 97.075,58.886 97.075,41.08 96.638,40.643 96.5,40.643 96.314,40.829 v1(96.217,40.829)
ADC_IN_N3: C4D.2 C6D.2 IC36.4 R6D.2 | length 21.6
  L1 w0.127: R6D.2@90.603,48.426 92.033,48.426 C4D.2@92.353,48.106 92.353,49.806 C6D.2@92.503,49.956 93.014,50.467 93.014,50.761 93.161,50.907 93.426,50.907 94.279,50.054 94.428,49.906 95.083,49.906 95.306,50.129 95.306,50.397 95.505,50.596 v1(95.505,50.658) ; v1(96.344,39.242) 96.42,39.165 IC36.4@97.189,39.165
  L4 w0.127: v1(95.505,50.658) 95.505,50.596 95.306,50.397 95.306,49.003 95.681,48.628 95.681,39.286 95.925,39.042 96.083,39.042 96.282,39.242 v1(96.344,39.242)
ADC_IN_N4: C4E.2 C6E.2 IC36.10 R6E.2 | length 14
  L1 w0.127: R6E.2@90.603,38.426 92.033,38.426 C4E.2@92.353,38.106 92.503,38.256 C6E.2@92.503,39.956 93.015,40.468 93.015,40.819 93.101,40.905 93.608,40.905 93.807,40.706 v1(93.869,40.706) ; v1(96.346,36.257) 96.414,36.189 97.165,36.189 IC36.10@97.189,36.165
  L4 w0.127: v1(93.869,40.706) 93.807,40.706 93.608,40.905 93.465,40.905 93.25,40.69 93.25,38.157 95.142,36.265 95.824,36.265 95.98,36.109 96.097,36.109 96.253,36.265 v1@96.338,36.265
ADC_IN_N5: C4F.2 C6F.2 IC36.13 R6F.2 | length 13.4
  L1 w0.127: R6F.2@90.603,28.426 92.033,28.426 C4F.2@92.353,28.106 92.503,28.256 C6F.2@92.503,29.956 93.015,30.468 93.015,30.703 93.217,30.905 93.608,30.905 93.807,30.706 v1(93.869,30.706) ; v1(96.27,34.697) 96.287,34.681 97.173,34.681 IC36.13@97.189,34.665
  L4 w0.127: v1(93.869,30.706) 93.807,30.706 93.608,30.905 93.303,30.905 93.229,30.98 92.971,31.238 92.971,32.73 94.725,34.485 96.01,34.485 96.222,34.697 v1(96.27,34.697)
ADC_IN_N6: C4G.2 C6G.2 IC36.16 R6G.2 | length 22.4
  L1 w0.127: R6G.2@90.603,18.426 92.033,18.426 C4G.2@92.353,18.106 92.353,19.806 C6G.2@92.503,19.956 92.984,20.437 92.984,20.791 93.14,20.948 93.737,20.948 94.39,21.6 95.521,21.6 95.786,21.334 95.786,21.039 v1(95.823,21.002) ; v1(98.288,32.555) 98.364,32.631 IC36.16@98.364,33.49
  L4 w0.127: v1(95.823,21.002) 95.786,21.039 95.786,21.334 95.604,21.517 95.471,21.65 95.471,24.096 98.071,26.696 98.071,31.246 98.487,31.662 98.487,32.294 98.288,32.493 v1(98.288,32.555)
ADC_IN_N7: C4H.2 C6H.2 IC36.19 R6H.2 | length 33.3
  L1 w0.127: R6H.2@90.603,8.426 92.033,8.426 C4H.2@92.353,8.106 92.503,8.256 C6H.2@92.503,9.956 C6H.2@92.503,10.164 ; C6H.2@92.984,10.437 92.984,10.791 93.14,10.948 93.737,10.948 95.079,12.29 96.859,12.29 97.14,12.008 97.14,11.712 v1(97.177,11.676) ; v1(99.788,32.58) 99.864,32.656 IC36.19@99.864,33.49
  L4 w0.127: v1(97.177,11.676) 97.14,11.712 97.14,12.008 96.787,12.362 96.459,12.69 96.459,20.409 99.407,23.357 99.407,31.38 99.987,31.96 99.987,32.319 99.788,32.518 v1(99.788,32.58)
ADC_IN_P0: C6A.1 C7A.1 IC36.48 R12A.2 | length 50.9
  L1 w0.127: C6A.1@90.703,79.956 90.703,81.636 R12A.2@90.603,81.736 90.923,82.056 C7A.1@92.353,82.056 92.473,82.056 92.985,81.545 92.985,81.372 93.136,81.221 93.663,81.221 93.67,81.214 94.329,80.555 94.329,80.381 94.329,74.396 95.121,73.604 95.375,73.35 99.766,68.959 101.133,68.959 101.332,69.159 v1(101.394,69.159) ; v1(99.788,42.155) 99.864,42.079 IC36.48@99.864,41.34
  L4 w0.127: v1(99.788,42.155) 99.788,42.217 99.987,42.416 99.987,68.556 100.391,68.959 101.195,68.959 v1@101.394,69.158
ADC_IN_P1: C6B.1 C7B.1 IC36.51 R12B.2 | length 40.1
  L1 w0.127: C6B.1@90.703,69.956 90.603,70.056 R12B.2@90.603,71.736 91.875,71.736 92.195,72.056 C7B.1@92.353,72.056 92.464,72.056 92.975,71.545 92.975,71.365 93.143,71.197 94.712,71.197 96.384,69.525 98.2,67.709 98.683,67.709 98.882,67.909 v1(98.944,67.909) ; v1(97.969,42.33) 98.113,42.33 98.24,42.202 98.24,42.167 98.364,42.044 IC36.51@98.364,41.34
  L4 w0.127: v1(97.969,42.33) 97.969,42.343 98.217,42.591 98.217,43.283 98.45,43.516 98.45,61.317 98.195,61.572 98.195,61.645 98.013,61.828 98.013,67.321 98.401,67.709 98.683,67.709 98.882,67.909 v1(98.944,67.909)
ADC_IN_P2: C6C.1 C7C.1 IC36.2 R12C.2 | length 30.7
  L1 w0.127: C6C.1@90.716,59.912 90.616,60.012 R12C.2@90.616,61.692 92.046,61.692 C7C.1@92.366,62.012 92.496,62.012 93.007,61.501 93.007,61.338 93.2,61.146 95.174,61.146 95.848,60.473 95.922,60.398 96.186,60.398 v1(96.257,60.327) ; v1(96.171,40.203) 96.19,40.184 97.17,40.184 IC36.2@97.189,40.165
  L4 w0.127: v1(96.171,40.203) 96.272,40.203 96.458,40.389 96.743,40.389 97.329,40.975 97.329,55.395 ; v1(96.257,60.327) 96.31,60.274 96.31,60.01 96.434,59.886 96.598,59.723 97.329,58.991 97.329,55.4
ADC_IN_P3: C6D.1 C7D.1 IC36.5 R12D.2 | length 21.6
  L1 w0.127: C6D.1@90.703,49.956 90.703,51.636 R12D.2@90.603,51.736 90.923,52.056 C7D.1@92.353,52.056 92.418,52.056 92.93,51.545 92.93,51.365 93.133,51.161 93.531,51.161 94.533,50.16 94.978,50.16 95.052,50.234 95.052,50.397 94.853,50.596 v1(94.853,50.658) ; v1(96.344,38.589) 96.42,38.665 IC36.5@97.189,38.665
  L4 w0.127: v1(94.853,50.658) 94.853,50.596 95.052,50.397 95.052,48.898 95.427,48.523 95.427,39.181 95.82,38.788 96.083,38.788 96.282,38.589 v1(96.344,38.589)
ADC_IN_P4: C6E.1 C7E.1 IC36.11 R12E.2 | length 14.9
  L1 w0.127: C6E.1@90.703,39.956 90.703,41.636 R12E.2@90.603,41.736 90.923,42.056 C7E.1@92.353,42.056 92.473,42.056 92.984,41.545 92.984,41.293 93.118,41.159 93.608,41.159 93.807,41.359 v1(93.869,41.359) ; v1(96.139,35.665) IC36.11@97.189,35.665
  L4 w0.127: v1(93.869,41.359) 93.807,41.359 93.608,41.159 93.36,41.159 92.996,40.795 92.996,38.052 95.037,36.011 95.719,36.011 96.065,35.665 v1(96.139,35.665)
ADC_IN_P5: C6F.1 C7F.1 IC36.14 R12F.2 | length 12.6
  L1 w0.127: C6F.1@90.703,29.956 90.603,30.056 R12F.2@90.603,31.736 92.033,31.736 C7F.1@92.353,32.056 92.503,32.056 93.015,31.545 93.015,31.353 93.209,31.159 93.608,31.159 93.807,31.359 v1(93.869,31.359) ; v1@96.317,34.049 96.357,34.089 96.53,34.089 96.602,34.161 97.184,34.161 IC36.14@97.189,34.165
  L4 w0.127: v1(93.869,31.359) 93.807,31.359 93.608,31.159 93.408,31.159 93.225,31.343 93.225,32.625 94.831,34.231 96.01,34.231 96.222,34.018 v1(96.27,34.018)
ADC_IN_P6: C6G.1 C7G.1 IC36.17 R12G.2 | length 22.2
  L1 w0.127: C6G.1@90.703,19.956 90.703,21.636 R12G.2@90.603,21.736 90.923,22.056 C7G.1@92.353,22.056 92.491,22.056 93.003,21.545 93.003,21.39 93.191,21.202 93.632,21.202 94.284,21.854 95.626,21.854 95.941,21.539 96.236,21.539 v1(96.273,21.502) ; IC36.17@98.864,33.49 98.864,32.631 v1(98.94,32.555)
  L4 w0.127: v1(96.273,21.502) 96.236,21.539 95.941,21.539 95.725,21.755 95.725,23.991 98.325,26.591 98.325,31.141 98.741,31.557 98.741,32.294 98.94,32.493 v1(98.94,32.555)
ADC_IN_P7: C6H.1 C7H.1 IC36.20 R12H.2 | length 33
  L1 w0.127: C6H.1@90.703,9.956 90.603,10.056 R12H.2@90.603,11.736 90.923,12.056 C7H.1@92.353,12.056 92.429,11.98 C7H.1@92.644,11.98 ; C7H.1@93.003,11.545 93.003,11.39 93.191,11.202 93.632,11.202 94.974,12.544 96.964,12.544 97.038,12.469 97.295,12.212 97.591,12.212 v1(97.627,12.176) ; IC36.20@100.364,33.49 100.364,32.656 v1(100.44,32.58)
  L4 w0.127: v1(97.627,12.176) 97.591,12.212 97.295,12.212 96.966,12.541 96.713,12.795 96.713,20.303 99.661,23.252 99.661,31.275 100.241,31.855 100.241,32.319 100.44,32.518 v1(100.44,32.58)
ADC_SCK_N: IC4.5 IC36.42 R79.1 | length 94.4
  L1 w0.127: IC36.42@102.864,41.34 102.864,41.942 102.962,42.039 102.962,42.288 103.982,43.308 104.333,43.308 104.625,43.6 R79.1@105.194,43.6 105.58,43.6 105.711,43.469 v1(105.917,43.469) ; v1(168.275,62.052) 168.448,61.879 176.643,61.879 179.981,58.542 180.756,58.542 180.828,58.613 181.316,58.613 IC4.5@181.367,58.664
  L4 w0.127: v1(105.917,43.469) 105.979,43.469 106.219,43.229 109.12,43.229 109.318,43.427 113.857,43.427 116.335,45.905 116.484,46.054 132.22,46.054 134.484,48.318 135.365,48.318 135.91,48.318 cw(c135.91,47.839) 136.39,47.839 136.39,47.177 ccw(c136.615,47.177) 136.615,46.951 137.291,46.951 ccw(c137.291,47.177) 137.517,47.177 137.517,47.911 cw(c137.996,47.911) 137.996,48.391 138.672,48.391 cw(c138.672,47.911) 139.152,47.911 139.152,47.177 ccw(c139.377,47.177) 139.377,46.951 140.053,46.951 ccw(c140.053,47.177) 140.279,47.177 140.279,47.839 cw(c140.758,47.839) 140.758,48.318 140.949,48.318 151.411,48.318 154.978,51.886 154.978,52.993 160.064,58.079 162.145,58.079 165.931,61.865 168.089,61.865 v1(168.275,62.052)
ADC_SCK_P: IC4.6 IC36.41 R79.2 | length 94.3
  L1 w0.127: IC36.41@103.364,41.34 103.364,41.942 103.266,42.039 103.266,42.161 104.108,43.003 104.347,43.003 104.69,42.66 R79.2@105.194,42.66 105.58,42.66 105.737,42.817 v1(105.944,42.817) ; v1(168.275,61.425) 168.475,61.625 176.538,61.625 179.876,58.288 180.756,58.288 180.828,58.215 181.316,58.215 IC4.6@181.367,58.164
  L4 w0.127: v1(105.944,42.817) 106.006,42.817 106.164,42.975 107.724,42.975 108.414,42.975 108.509,42.881 108.509,42.776 108.603,42.682 109.041,42.682 109.136,42.776 109.136,42.885 109.423,43.173 109.772,43.173 113.962,43.173 116.589,45.8 132.325,45.8 134.589,48.064 135.365,48.064 135.91,48.064 cw(c135.91,47.839) 136.136,47.839 136.136,47.177 ccw(c136.615,47.177) 136.615,46.697 137.291,46.697 ccw(c137.291,47.177) 137.771,47.177 137.771,47.911 cw(c137.996,47.911) 137.996,48.137 138.672,48.137 cw(c138.672,47.911) 138.898,47.911 138.898,47.177 ccw(c139.377,47.177) 139.377,46.697 140.053,46.697 ccw(c140.053,47.177) 140.533,47.177 140.533,47.839 cw(c140.758,47.839) 140.758,48.064 140.949,48.064 151.516,48.064 155.232,51.78 155.232,52.888 160.17,57.825 162.25,57.825 166.037,61.611 168.089,61.611 v1(168.275,61.425)
ADC_SDOA_N: IC5.1 IC14.1 IC36.28 R21.1 | length 97.7
  L1 w0.127: IC36.28@104.039,34.665 104.465,34.665 104.563,34.568 105.072,34.568 105.786,33.853 107.794,33.853 108.219,34.279 108.219,34.68 108.058,34.841 v1(108.058,34.879) ; v1(158.722,52.135) 158.904,52.317 159.084,52.317 R21.1@159.427,51.974 ; R21.1@159.447,51.974 159.674,52.2 159.674,52.243 159.748,52.317 160.339,52.317 160.478,52.179 IC14.1@160.478,50.894 ; v1(164.222,49.135) 164.404,49.317 165.839,49.317 165.978,49.179 IC5.1@165.978,47.894
  L4 w0.127: v1(108.058,34.879) 108.058,34.804 108.244,34.618 108.244,34.249 108.659,33.834 113.443,33.834 115.65,36.041 115.65,39.3 117.796,41.446 129.194,41.446 130.076,41.446 cw(c130.076,41.221) 130.301,41.221 130.301,41.216 ccw(c130.78,41.216) 130.78,40.737 131.457,40.737 ccw(c131.457,41.216) 131.936,41.216 131.936,41.256 cw(c132.161,41.256) 132.161,41.481 132.838,41.481 cw(c132.838,41.256) 133.063,41.256 133.063,41.216 ccw(c133.542,41.216) 133.542,40.737 134.219,40.737 ccw(c134.219,41.216) 134.698,41.216 134.698,41.256 cw(c134.923,41.256) 134.923,41.481 135.6,41.481 cw(c135.6,41.256) 135.825,41.256 135.825,38.47 ccw(c136.304,38.47) 136.304,37.991 136.981,37.991 ccw(c136.981,38.47) 137.46,38.47 137.46,41.256 cw(c137.685,41.256) 137.685,41.481 138.362,41.481 cw(c138.362,41.256) 138.587,41.256 138.587,38.47 ccw(c139.066,38.47) 139.066,37.991 139.743,37.991 ccw(c139.743,38.47) 140.222,38.47 140.222,41.256 cw(c140.447,41.256) 140.447,41.481 141.124,41.481 cw(c141.124,41.256) 141.349,41.256 141.349,40.304 ccw(c141.828,40.304) 141.828,39.825 142.505,39.825 ccw(c142.505,40.304) 142.984,40.304 142.984,41.221 cw(c143.209,41.221) 143.209,41.446 143.4,41.446 143.771,41.446 147.375,45.05 151.9,45.05 157.506,50.656 157.506,51.843 157.982,52.319 158.461,52.319 158.645,52.135 v1(158.722,52.135) 158.799,52.135 158.983,52.319 159.393,52.319 162.392,49.319 163.961,49.319 164.145,49.135 v1(164.222,49.135)
ADC_SDOA_P: IC5.8 IC14.8 IC36.27 R21.2 | length 97.8
  L1 w0.127: IC36.27@104.039,34.165 104.465,34.165 104.563,34.263 104.945,34.263 105.66,33.549 107.92,33.549 108.524,34.153 108.524,34.68 108.685,34.841 v1(108.685,34.879) ; v1(158.722,52.762) 158.913,52.571 159.084,52.571 R21.2@159.427,52.914 ; R21.2@159.447,52.914 159.674,52.687 159.674,52.645 159.748,52.571 160.344,52.571 160.478,52.705 IC14.8@160.478,53.994 ; v1(164.222,49.762) 164.413,49.571 165.844,49.571 165.978,49.705 IC5.8@165.978,50.994
  L4 w0.127: v1(108.685,34.879) 108.685,34.804 108.498,34.618 108.498,34.354 108.764,34.088 113.338,34.088 115.396,36.146 115.396,39.405 117.691,41.7 129.194,41.7 130.076,41.7 cw(c130.076,41.221) 130.555,41.221 130.555,41.216 ccw(c130.78,41.216) 130.78,40.991 131.457,40.991 ccw(c131.457,41.216) 131.682,41.216 131.682,41.256 cw(c132.161,41.256) 132.161,41.735 132.838,41.735 cw(c132.838,41.256) 133.317,41.256 133.317,41.216 ccw(c133.542,41.216) 133.542,40.991 134.219,40.991 ccw(c134.219,41.216) 134.444,41.216 134.444,41.256 cw(c134.923,41.256) 134.923,41.735 135.6,41.735 cw(c135.6,41.256) 136.079,41.256 136.079,38.47 ccw(c136.304,38.47) 136.304,38.245 136.981,38.245 ccw(c136.981,38.47) 137.206,38.47 137.206,41.256 cw(c137.685,41.256) 137.685,41.735 138.362,41.735 cw(c138.362,41.256) 138.841,41.256 138.841,38.47 ccw(c139.066,38.47) 139.066,38.245 139.743,38.245 ccw(c139.743,38.47) 139.968,38.47 139.968,41.256 cw(c140.447,41.256) 140.447,41.735 141.124,41.735 cw(c141.124,41.256) 141.603,41.256 141.603,40.304 ccw(c141.828,40.304) 141.828,40.079 142.505,40.079 ccw(c142.505,40.304) 142.73,40.304 142.73,41.221 cw(c143.209,41.221) 143.209,41.7 143.4,41.7 143.666,41.7 147.27,45.304 151.795,45.304 157.252,50.761 157.252,51.949 157.877,52.573 158.456,52.573 158.645,52.762 v1(158.722,52.762) 158.799,52.762 158.988,52.573 159.498,52.573 162.498,49.573 163.956,49.573 164.145,49.762 v1(164.222,49.762)
ADC_SDOB_N: IC15.8 IC36.30 R22.2 | length 94.7
  L1 w0.127: IC36.30@104.039,35.665 104.968,35.665 104.924,35.709 v1(104.924,35.757) ; v1(158.722,45.262) 158.913,45.071 159.084,45.071 R22.2@159.427,45.414 ; R22.2@159.447,45.414 159.673,45.188 159.673,45.146 159.748,45.071 160.344,45.071 160.477,45.205 IC15.8@160.477,46.494
  L4 w0.127: v1(104.924,35.757) 105.131,35.55 105.549,35.55 105.829,35.27 105.829,33.459 108.009,31.279 117.805,31.279 119.469,29.615 129.215,29.615 129.406,29.615 ccw(c129.406,29.841) 129.631,29.841 129.631,31.783 cw(c130.11,31.783) 130.11,32.262 130.787,32.262 cw(c130.787,31.783) 131.266,31.783 131.266,29.433 ccw(c131.491,29.433) 131.491,29.208 132.168,29.208 ccw(c132.168,29.433) 132.393,29.433 132.393,31.783 cw(c132.872,31.783) 132.872,32.262 133.549,32.262 cw(c133.549,31.783) 134.028,31.783 134.028,29.433 ccw(c134.253,29.433) 134.253,29.208 134.93,29.208 ccw(c134.93,29.433) 135.155,29.433 135.155,31.783 cw(c135.634,31.783) 135.634,32.262 136.311,32.262 cw(c136.311,31.783) 136.79,31.783 136.79,29.433 ccw(c137.015,29.433) 137.015,29.208 137.692,29.208 ccw(c137.692,29.433) 137.917,29.433 137.917,31.783 cw(c138.396,31.783) 138.396,32.262 139.073,32.262 cw(c139.073,31.783) 139.552,31.783 139.552,29.433 ccw(c139.777,29.433) 139.777,29.208 140.454,29.208 ccw(c140.454,29.433) 140.679,29.433 140.679,31.783 cw(c141.158,31.783) 141.158,32.262 141.835,32.262 cw(c141.835,31.783) 142.314,31.783 142.314,30.142 ccw(c142.539,30.142) 142.699,29.983 143.198,30.482 157.788,45.073 158.455,45.073 158.645,45.262 v1(158.722,45.262)
ADC_SDOB_P: IC15.1 IC36.29 R22.1 | length 94.5
  L1 w0.127: IC36.29@104.039,35.165 104.968,35.165 v1(105.044,35.089) ; v1(158.722,44.635) 158.904,44.817 159.084,44.817 R22.1@159.427,44.474 ; R22.1@159.447,44.474 159.673,44.701 159.673,44.743 159.748,44.817 160.339,44.817 160.477,44.679 IC15.1@160.477,43.394
  L4 w0.127: v1(105.044,35.089) 105.251,35.296 105.444,35.296 105.575,35.165 105.575,33.353 107.903,31.025 117.7,31.025 119.364,29.361 129.215,29.361 129.406,29.361 ccw(c129.406,29.841) 129.885,29.841 129.885,31.783 cw(c130.11,31.783) 130.11,32.008 130.787,32.008 cw(c130.787,31.783) 131.012,31.783 131.012,29.433 ccw(c131.491,29.433) 131.491,28.954 132.168,28.954 ccw(c132.168,29.433) 132.647,29.433 132.647,31.783 cw(c132.872,31.783) 132.872,32.008 133.549,32.008 cw(c133.549,31.783) 133.774,31.783 133.774,29.433 ccw(c134.253,29.433) 134.253,28.954 134.93,28.954 ccw(c134.93,29.433) 135.409,29.433 135.409,31.783 cw(c135.634,31.783) 135.634,32.008 136.311,32.008 cw(c136.311,31.783) 136.536,31.783 136.536,29.433 ccw(c137.015,29.433) 137.015,28.954 137.692,28.954 ccw(c137.692,29.433) 138.171,29.433 138.171,31.783 cw(c138.396,31.783) 138.396,32.008 139.073,32.008 cw(c139.073,31.783) 139.298,31.783 139.298,29.433 ccw(c139.777,29.433) 139.777,28.954 140.454,28.954 ccw(c140.454,29.433) 140.933,29.433 140.933,31.783 cw(c141.158,31.783) 141.158,32.008 141.835,32.008 cw(c141.835,31.783) 142.06,31.783 142.06,30.142 ccw(c142.539,30.142) 142.878,29.803 143.198,30.123 157.894,44.819 158.461,44.819 158.644,44.635 v1(158.722,44.635)
ADC_SDOC_N: IC16.8 IC36.36 R23.2 | length 94.3
  L1 w0.127: IC36.36@104.039,38.665 104.893,38.665 v1(104.969,38.742) ; v1(164.222,42.263) 164.413,42.072 164.584,42.072 R23.2@164.927,42.415 ; R23.2@164.947,42.415 165.174,42.188 165.174,42.146 165.248,42.072 165.844,42.072 165.978,42.206 IC16.8@165.978,43.495